# Altium PCB PCB1.PcbDoc
Units mm, origin at the board's own origin, x right, y up, seen from the top; angles counter-clockwise.
Board outline 28 x 28 mm, 2 copper layers (Top Layer, Bottom Layer); 8 components, 13 nets, 42 pads, 3 vias.
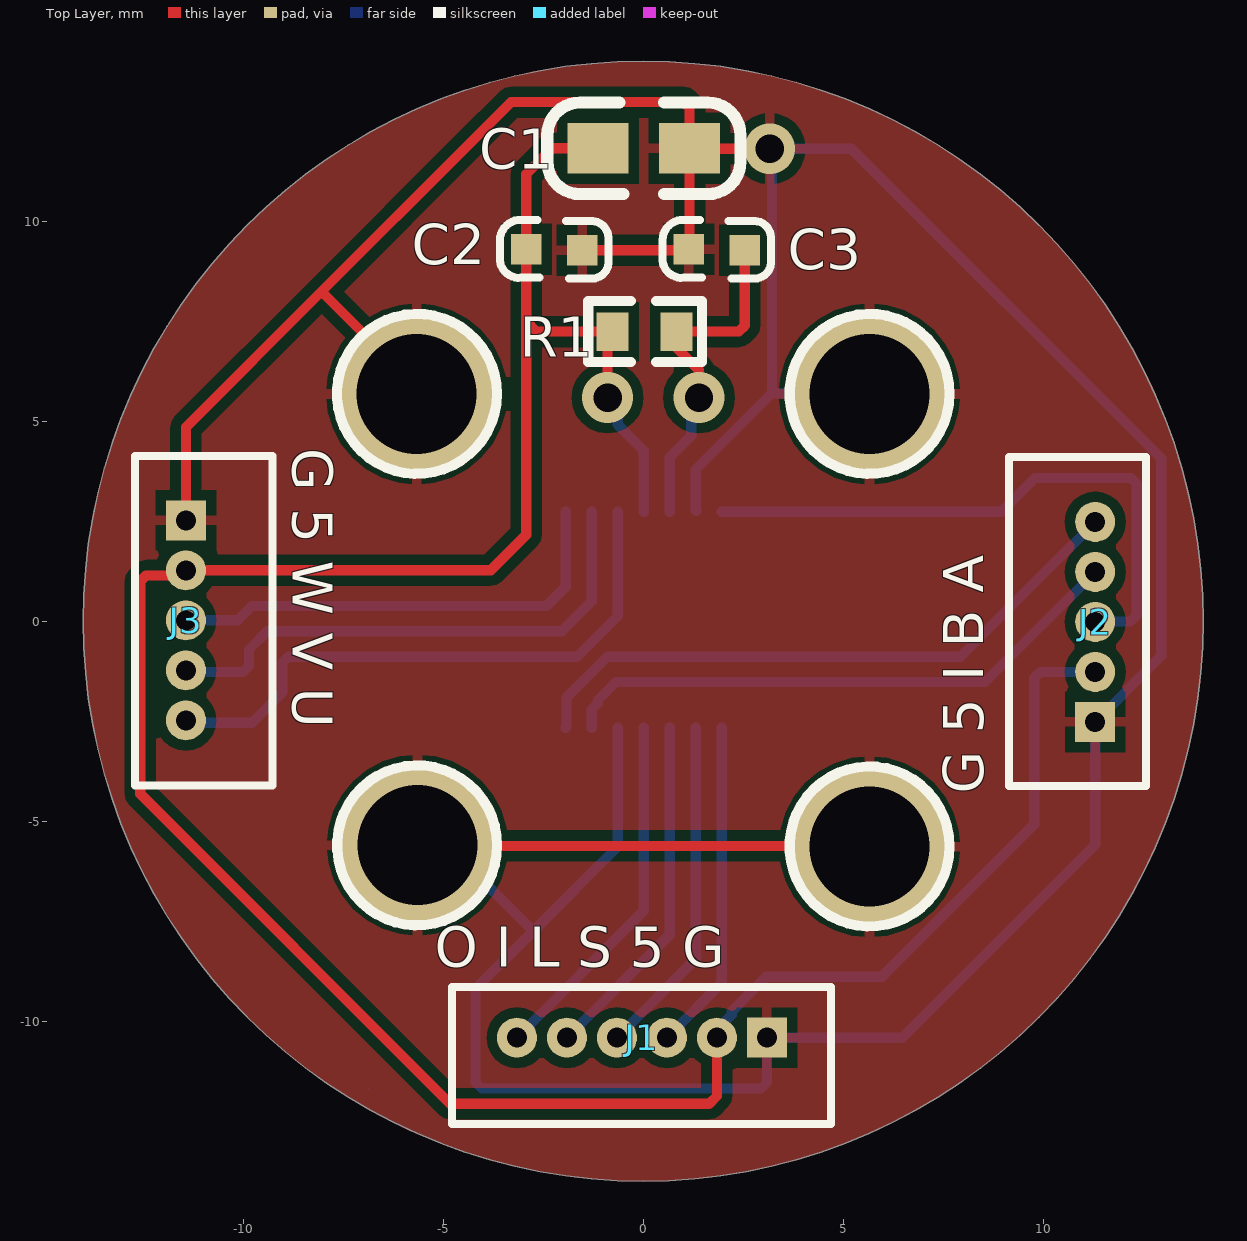
[diagram p0: Top Layer view]
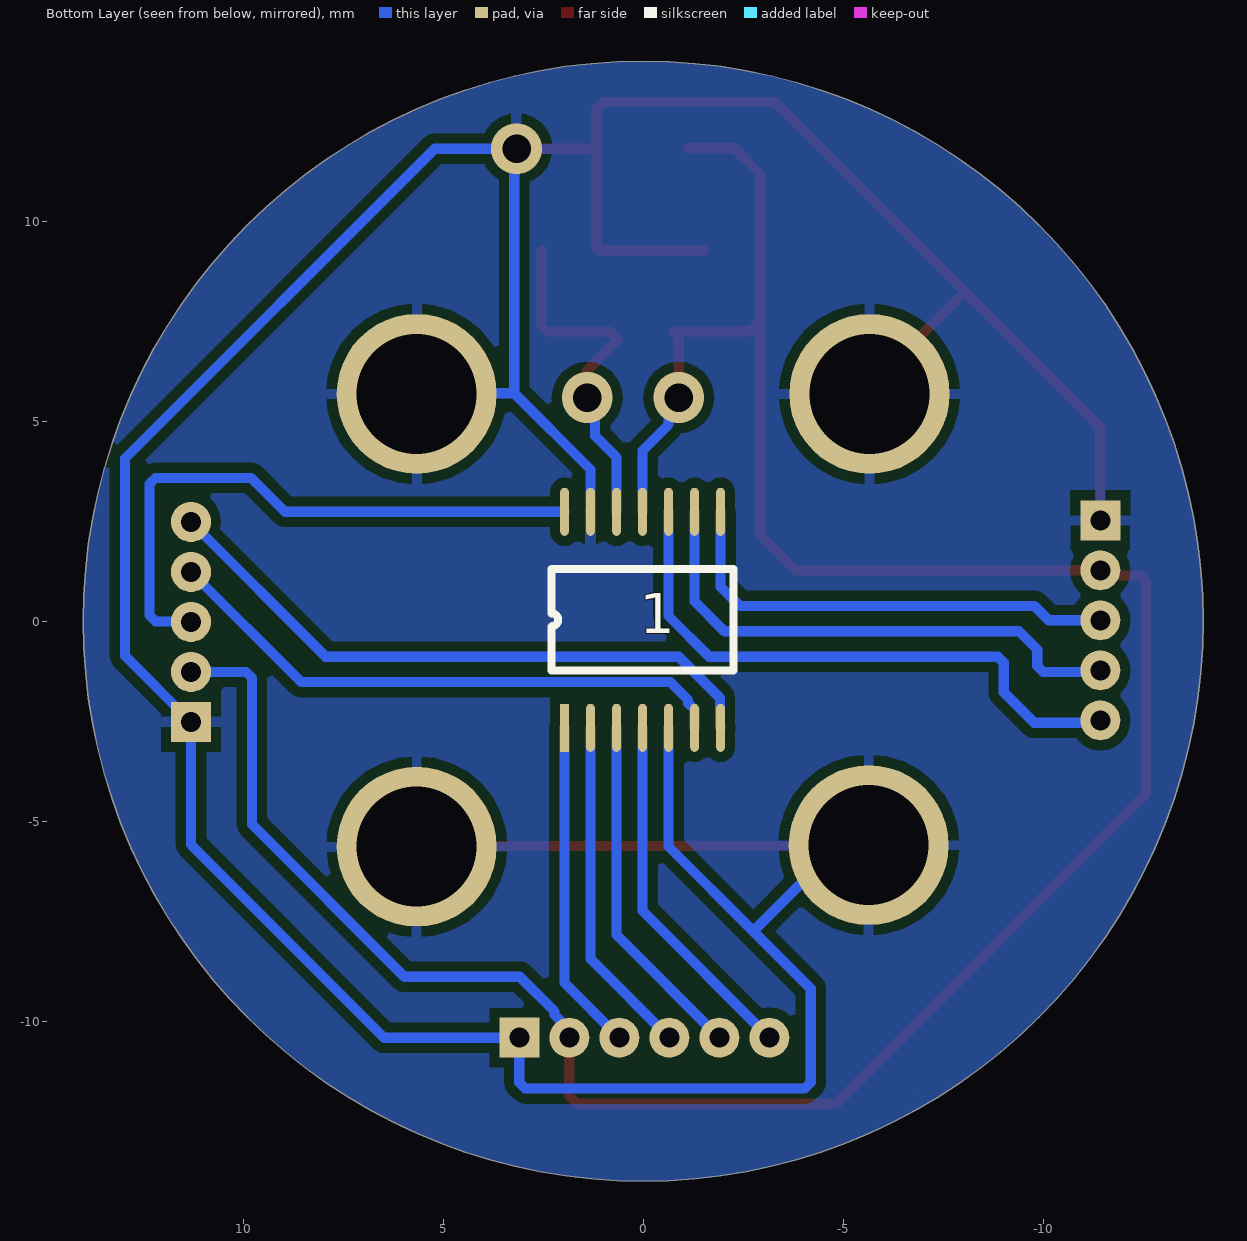
[diagram p1: Bottom Layer view, seen from below]
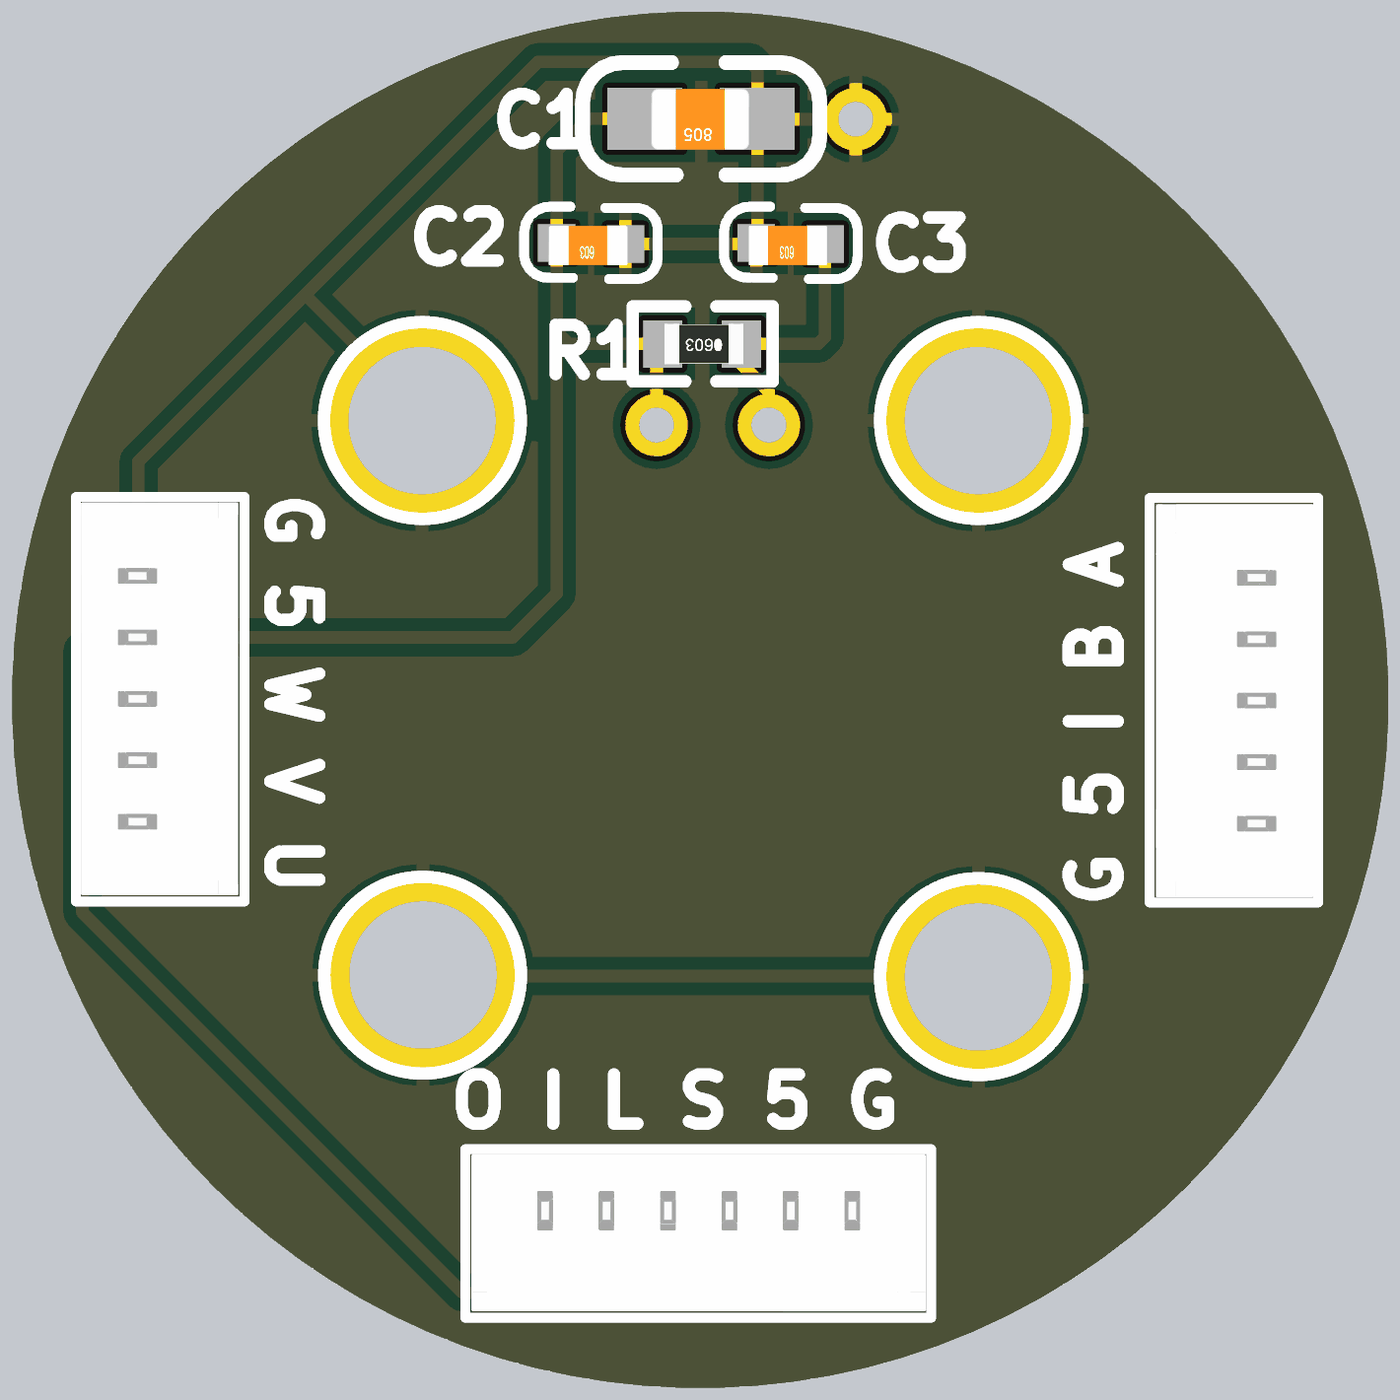
[diagram p2: 3D render of the assembled board from above, using the file's embedded part models]

## Layer stack, top to bottom
Top Solder: solder mask 0.0102, Solder Resist, Dk 3.5
Top Layer: signal copper 0.0356
Dielectric 1: dielectric 0.32, FR-4, Dk 4.8
Bottom Layer: signal copper 0.0356
Bottom Solder: solder mask 0.0102, Solder Resist, Dk 3.5

## Board outline
0,-14 cw(c0,0) -14,0 cw(c0,0) 0,14 cw(c0,0) 14,0 cw(c0,0)
cut-out: -6.858,-11.684

## Design rules (kind name [scope] priority, off if disabled: settings)
Clearance [All] p1: gap=0.254 ignorepadtopadclearanceinfootprint=FALSE except(0: Arc-Hole Track-Hole SMDPad-Hole THPad-Hole Via-Hole Fill-Hole Poly-Hole Region-Hole Text-Hole)
PolygonConnect [All] p1: connectstyle=Relief reliefconductorwidth=0.254 reliefentries=4 polygonreliefangle="90 Angle" airgapwidth=0.254
RoutingVias [All] p1: holewidth=0.711 width=1.27 viastyle="Through Hole" minholewidth=0.711 minwidth=1.27 maxholewidth=0.711 maxwidth=1.27
SolderMaskExpansion [All] p1: expansion=0.102 istentingtop=FALSE
Width [All] p1: maxlimit=0.254 minlimit=0.254 preferedwidth=0.254
30 further rules are at their usual default settings.

## Components (designator, comment, footprint, x,y, rotation, side; value= is the part's Value field where it differs from the comment)
1 "AS5147P" TSSOP14MAX 1.965,-2.667 r90 bottom
C1 "Cap" 0805C 1.143,11.811 r180 top value=10uf
C2 "Cap" 0603C -1.519,9.262 r180 top value=100nf
C3 "Cap" 0603C 2.545,9.262 r180 top value=1uf
J1 "MX1.25-6P" MX1.25-6P 3.095,-10.414 r180 top
J2 "MX1.25-5P" MX1.25-5P 11.303,-2.52 r90 top
J3 "MX1.25-5P" MX1.25-5P -11.43,2.52 r270 top
R1 "Res1" 0603R 0.838,7.239 r180 top value=0R

## Footprints (in the part's own frame and the unit in brackets; to place one, negate y for a bottom-side part, rotate by r counter-clockwise, add the part's x,y. Pads: shape width x height; smd on the part's side, far side on the other; paste and mask are expansions set on the pad)
0603C [mil]
  rect 30x30 smd: 1(0.21,-0.35) 2(55.21,-1.35)
  silkscreen extent -26,-30 81,28, body extent -1,-15 62,17, height 12
0603R [mm]
  rect 0.8x0.965 smd: 1(0,0) 2(1.6,0)
  silkscreen extent -0.64,-0.76 2.21,0.76, body extent -0.04,-0.41 1.56,0.41, height 0.45
0805C [mil]
  rect 60x50 smd: 1(-0.71,-0.4) 2(89.29,-0.4)
  silkscreen extent -51,-45 139,45, body extent 6,-25 84,25, height 31
MX1.25-5P [mm]
  rect 1x1 hole 0.5: 1(0,0)
  round 1 hole 0.5: 2(1.25,0) 3(2.5,0) 4(3.75,0) 5(5,0)
  silkscreen extent -1.6,-1.27 6.62,2.16, body extent -1.5,-1.17 6.5,2.03, height 4.25
MX1.25-6P [mm]
  rect 1x1 hole 0.5: 1(0,0)
  round 1 hole 0.5: 2(1.25,0) 3(2.5,0) 4(3.75,0) 5(5,0) 6(6.25,0)
  silkscreen extent -1.6,-1.27 7.87,2.16, body extent -1.5,-1.17 7.75,2.03, height 4.25
TSSOP14MAX [mm]
  rect 1.2x0.22 smd: 1(0,0)
  oval 1.2x0.22 smd: 2(0,-0.65) 3(0,-1.3) 4(0,-1.95) 5(0,-2.6) 6(0,-3.25) 7(0,-3.9) 8(5.4,-3.9) 9(5.4,-3.25) 10(5.4,-2.6) 11(5.4,-1.95) 12(5.4,-1.3) 13(5.4,-0.65) 14(5.4,0)
  silkscreen extent 1.43,-4.22 3.96,0.33, body extent -0.52,-4.48 5.88,0.52, height 1.2

## Part data
C1 C2 C3: "Capacitor", LatestRevisionDate=17-Jul-2002, LatestRevisionNote="Re-released for DXP Platform.", PackageDescription="Radial Cap, Thru-Hole; 2 Leads; 0.3 in Pin Spacing", PackageReference=RAD-0.3, Published=8-Jun-2000, Publisher="Altium Limited"
R1: "Resistor", LatestRevisionDate=17-Jul-2002, LatestRevisionNote="Re-released for DXP Platform.", PackageDescription="Axial Device, Thru-Hole; 2 Leads; 0.3 in Pin Spacing", PackageReference=AXIAL-0.3, Published=8-Jun-2000, Publisher="Altium Limited"

## Free pads (board coordinates)
  round 4 hole 3: 5(-5.66,5.68) 6(5.66,5.68) 7(5.66,-5.64) 8(-5.64,-5.6)

## Via types
v1: diameter 1.27, hole 0.711, Top Layer to Bottom Layer, 3 vias

## Nets (pads, with @x,y where several pads share a name; then routed paths per layer and width w, separated by ;. In a path a pad name is that pad's centre, name@x,y a point inside that pad or via, vN(x,y) a via of type N, cw(c..) or ccw(c..) an arc to the next point about the centre after c; other vN are vias at no path point)
+5: 1.11 C1.2 C2.2 J1.2 J2.2 J3.2 R1.2 | length 68.7
  Top Layer w0.254: C1.2 -2.276,11.821 -2.921,11.176 C2.2 -2.921,7.493 ; v1(-0.889,5.588) -0.889,7.112 R1.2 -2.667,7.239 -2.921,7.493 ; J1.2 1.845,-11.871 1.651,-12.065 -4.826,-12.065 -12.573,-4.318 -12.573,0.994 -12.424,1.143 -11.557,1.143 J3.2 -3.81,1.27 -2.921,2.159 -2.921,7.493
  Bottom Layer w0.254: v1@-0.635,5.969 -0.635,4.912 0.015,4.263 1.11 ; J1.2 1.845,-10.212 2.214,-9.843 2.214,-9.756 3.08,-8.89 5.969,-8.89 9.779,-5.08 9.779,-1.419 9.928,-1.27 J2.2
GND: 1.5 1.13 C1.1 C2.1 C3.2 J1.1 J2.1 J3.1 pad.5 pad.6 pad.7 pad.8 | length 110
  Top Layer w0.254: J3.1 -11.43,4.848 -8.039,8.239 ; pad.5 -5.66,5.86 -8.039,8.239 ; pad.8 -5.62,-5.62 5.64,-5.62 pad.7 ; C2.1 1.118,9.271 C3.2 1.161,9.314 C1.1 ; v1(3.164,11.811) 1.171,11.811 C1.1 ; -8.039,8.239 -4.348,11.93 -3.302,12.976 1.012,12.976 1.161,12.827 C1.1
  Bottom Layer w0.254: pad.8 -4.9,-5.6 -2.75,-7.75 ; 1.5 -0.635,-5.634 -2.75,-7.75 ; 1.13@1.332,2.75 1.315,2.767 1.315,3.792 3.22,5.697 ; pad.6 5.643,5.697 3.22,5.697 ; -2.75,-7.75 -4.191,-9.19 -4.191,-11.535 -4.042,-11.684 2.946,-11.684 3.095,-11.535 J1.1 6.477,-10.414 11.303,-5.588 J2.1 12.954,-0.869 12.954,4.064 5.207,11.811 v1(3.164,11.811) 3.22,11.755 3.22,5.697
Net1_1: 1.1 J1.3 | length 8.3
  Bottom Layer w0.254: J1.3 1.965,-9.044 1.1
Net1_2: 1.2 J1.4 | length 8.6
  Bottom Layer w0.254: J1.4 1.315,-8.444 1.2
Net1_3: 1.3 J1.5 | length 8.8
  Bottom Layer w0.254: J1.5 0.665,-7.844 1.3
Net1_4: 1.4 J1.6 | length 9.1
  Bottom Layer w0.254: J1.6 0.015,-7.244 1.4
Net1_6: 1.6 J2.4 | length 14.5
  Bottom Layer w0.254: 1.6 -1.285,-2.211 -1.126,-2.052 -1.126,-1.974 -0.676,-1.524 8.549,-1.524 J2.4
Net1_7: 1.7 J2.5 | length 15.8
  Bottom Layer w0.254: 1.7 -1.918,-2.65 -1.918,-1.918 -0.889,-0.889 7.934,-0.889 J2.5
Net1_8: 1.8 J3.3 | length 11.7
  Bottom Layer w0.254: J3.3 -10.14,0.02 -9.779,0.381 -2.413,0.381 -1.935,0.859 1.8
Net1_9: 1.9 J3.4 | length 13.4
  Bottom Layer w0.254: J3.4 -11.39,-1.27 -10.002,-1.27 -9.853,-1.121 -9.853,-0.709 -9.398,-0.254 -2.032,-0.254 -1.285,0.493 1.9
Net1_10: 1.10 J3.5 | length 15
  Bottom Layer w0.254: J3.5 -11.37,-2.54 -9.779,-2.54 -9.017,-1.778 -9.017,-1.038 -8.868,-0.889 -1.651,-0.889 -0.635,0.127 1.10
Net1_12: 1.12 C3.1 R1.1 | length 8.9
  Top Layer w0.254: v1(1.397,5.588) 1.397,6.274 0.635,7.036 R1.1 2.391,7.239 2.54,7.388 C3.1
  Bottom Layer w0.254: 1.12 0.665,4.094 1.203,4.632 1.203,5.394 v1(1.397,5.588)
Net1_14: 1.14 J2.3 | length 15.2
  Bottom Layer w0.254: 1.14 8.953,2.733 9.8,3.58 12.192,3.58 12.341,3.431 12.341,0.149 12.184,-0.008 11.315,-0.008 J2.3

## Polygon pours and split planes (outlines as drawn)
GND on Top Layer "Top Layer-No Net" (solid, pour order 14): 0,-14 cw(c0,0) -14,0 cw(c0,0) 0,14 cw(c0,0) 14,0 cw(c0,0)
no net on Top Layer "NONET_L01_P000" (solid, pour order 0): -8.509,-11.176
no net on Top Layer "NONET_L01_P001" (solid, pour order 1): -4.953,13.081
GND on Bottom Layer "Top Layer-No Net1" (solid, pour order 15): 0,-14 cw(c0,0) -14,0 cw(c0,0) 0,14 cw(c0,0) 14,0 cw(c0,0)

## Silkscreen, mask and mechanical layers (free items; w line width, h text height)
Top Overlay:
  circle w0.254: c5.661,-5.634 r2
  circle w0.254: c5.661,5.682 r2
  circle w0.254: c-5.654,5.682 r2
  circle w0.254: c-5.649,-5.605 r2
  text "G 5 W V U" at -8.763,4.318 h1 r270
  text "G 5 I B A" at 8.509,-4.318 h1 r90
  text "O I L S 5 G" at -5.207,-8.636 h1
Mechanical 1:
  circle w0.254: c0,0 r14